# Altium PCB hazi_kiindulas.PcbDoc
Units mm, origin at the board's own origin, x right, y up, seen from the top; angles counter-clockwise.
Board outline 90.17 x 82.17 mm, 2 copper layers (Top Layer, Bottom Layer); 35 components, 55 nets, 240 pads, 42 vias.
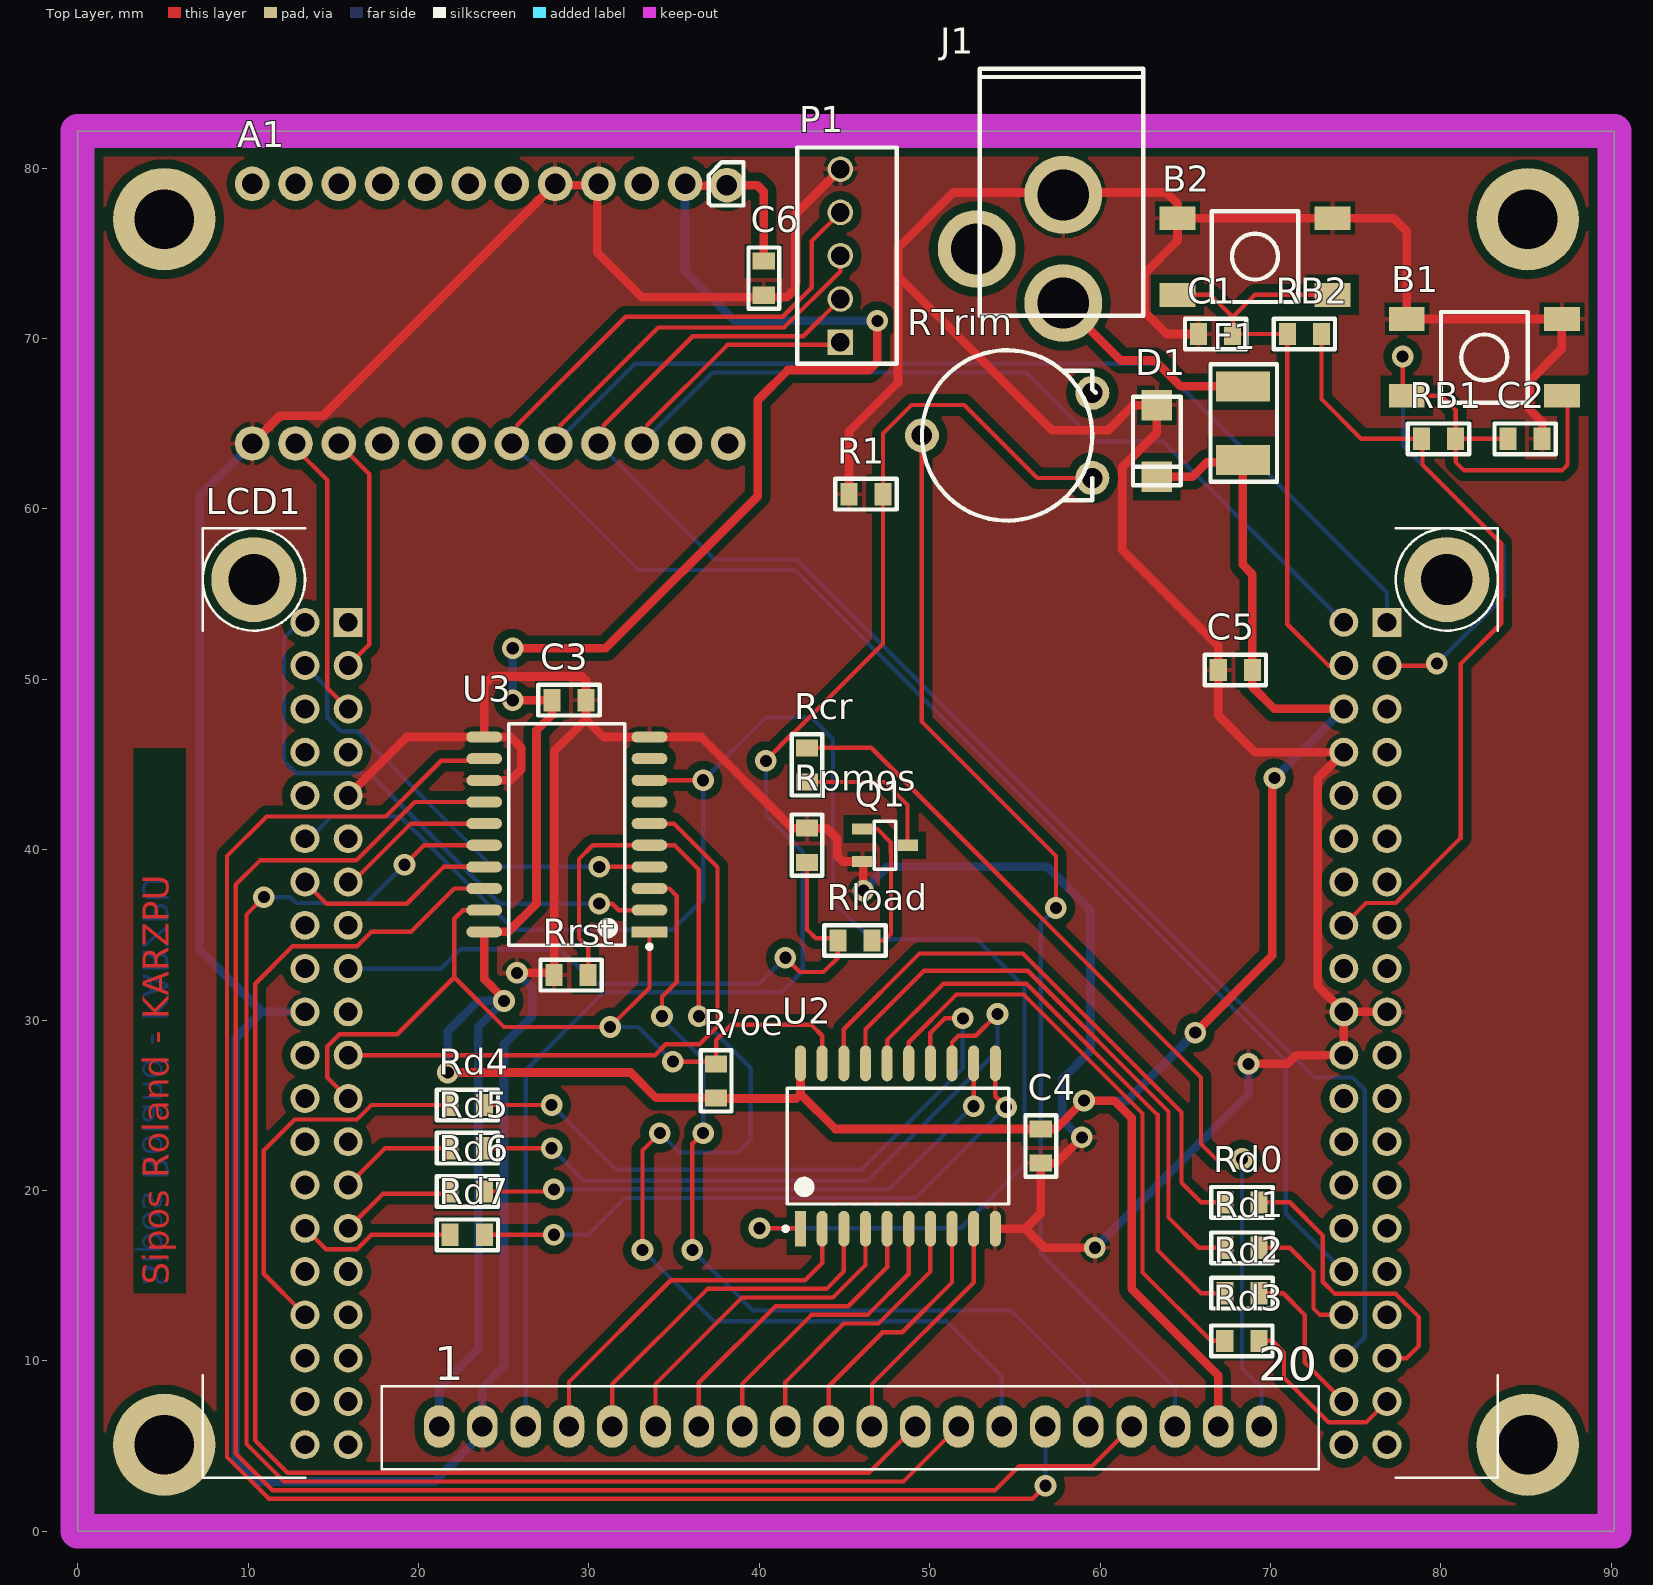
[diagram p0: Top Layer view]
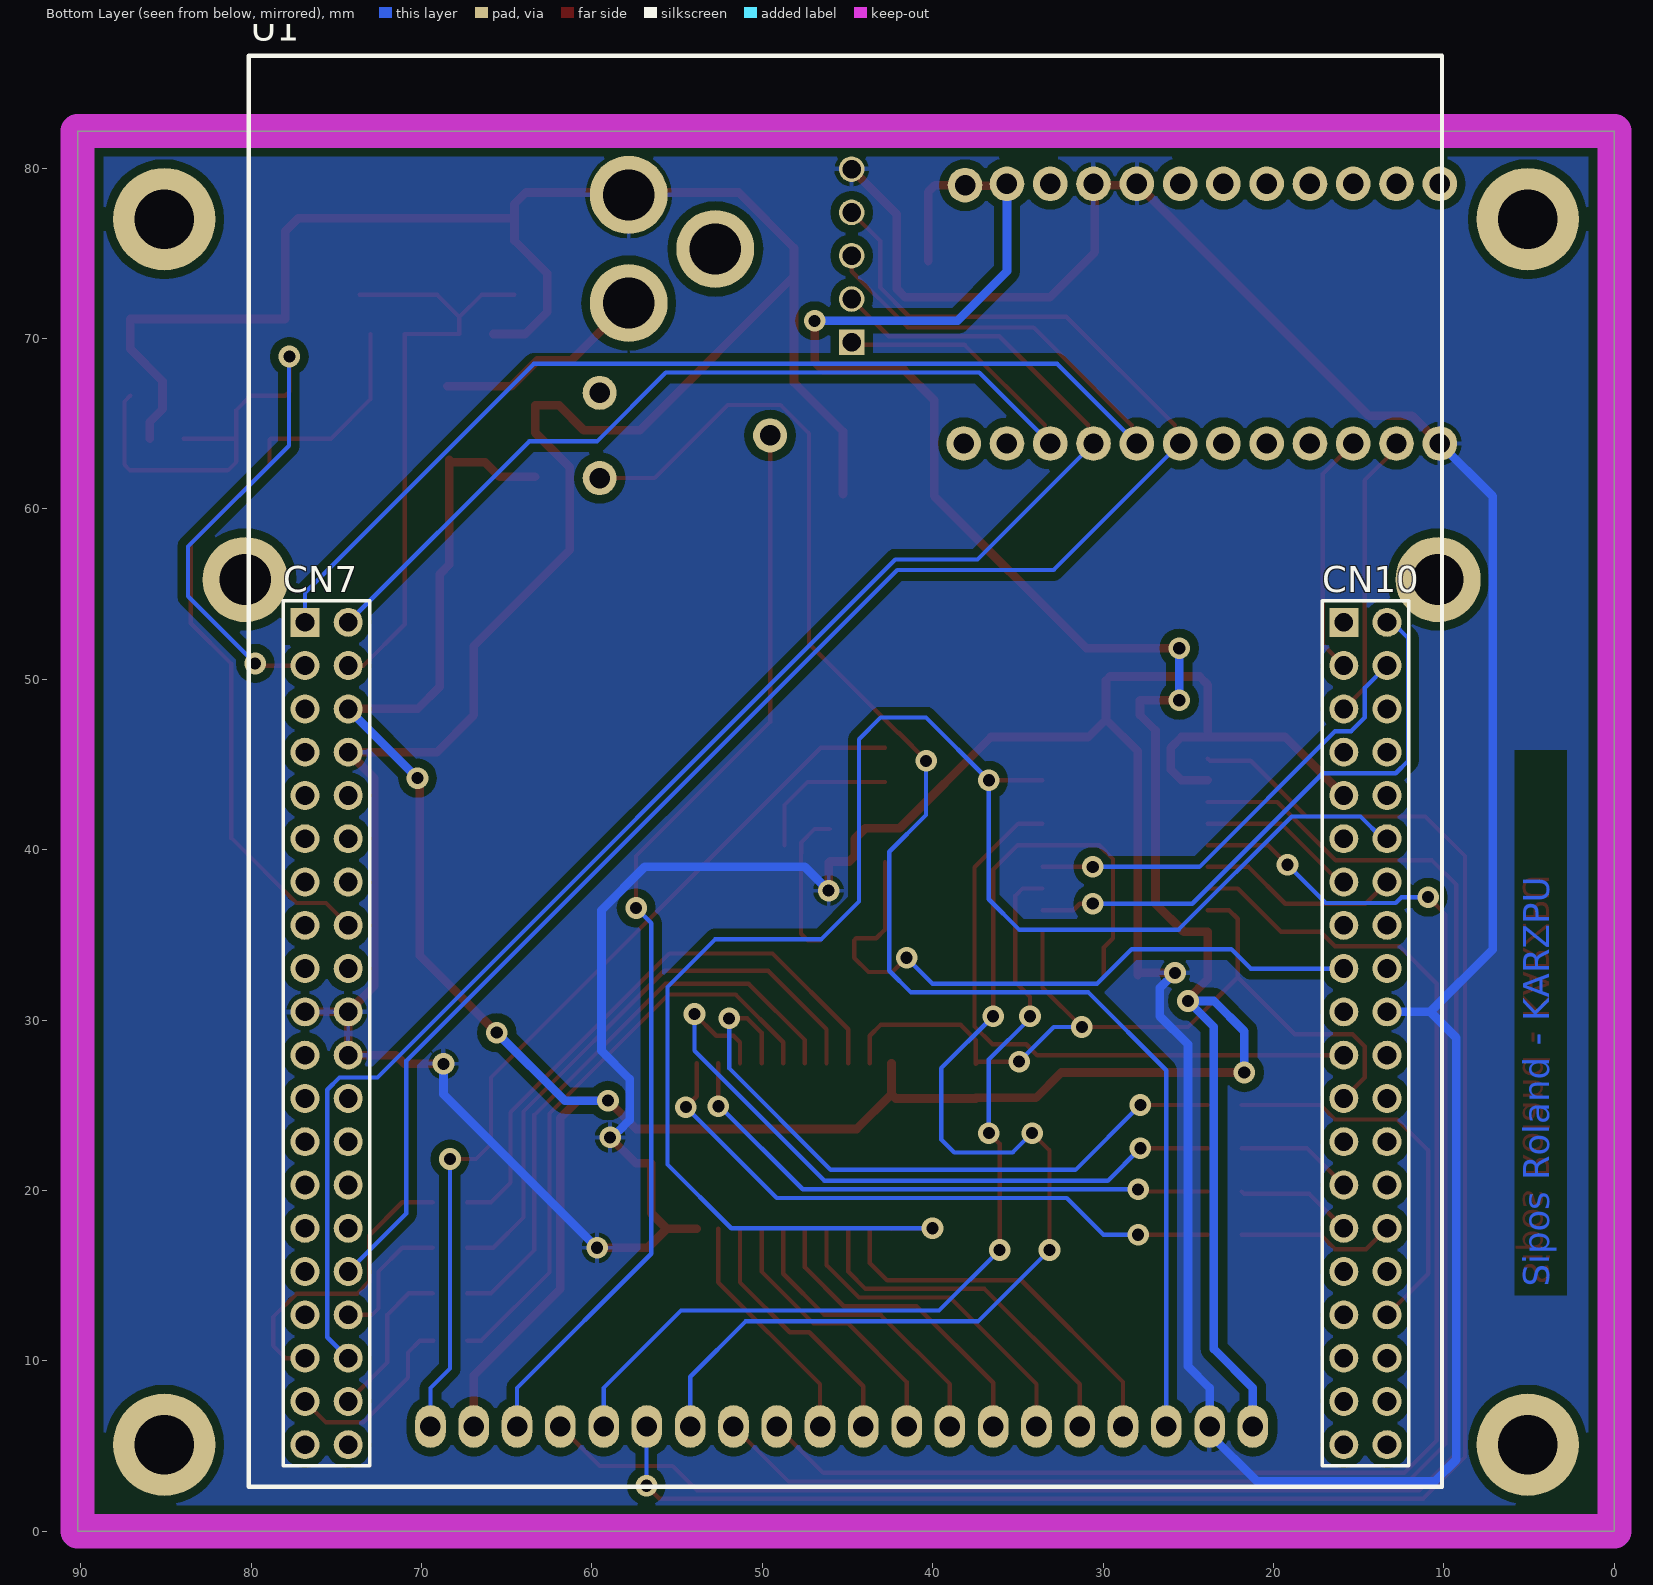
[diagram p1: Bottom Layer view, seen from below]
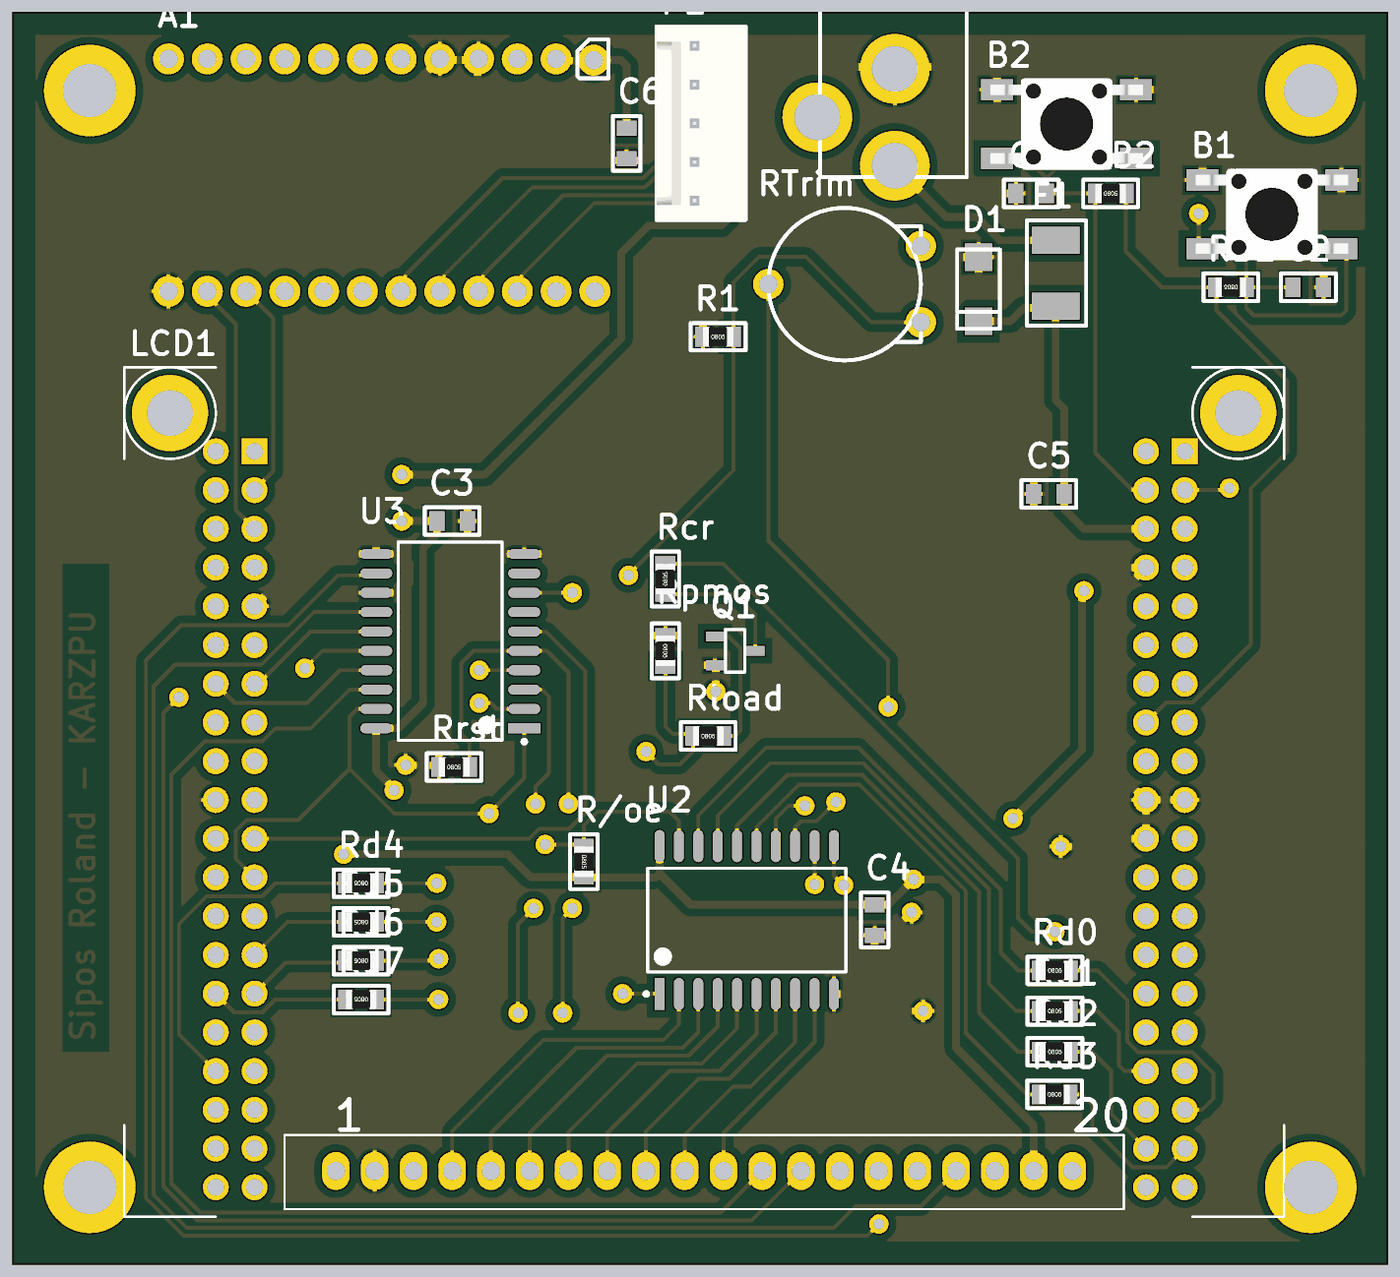
[diagram p2: 3D render of the assembled board from above, using the file's embedded part models]

## Layer stack, top to bottom
Top Solder: solder mask 0.0102, Solder Resist, Dk 3.5
Top Layer: signal copper 0.0356
Dielectric 1: dielectric 0.32, FR-4, Dk 4.8
Bottom Layer: signal copper 0.0356
Bottom Solder: solder mask 0.0102, Solder Resist, Dk 3.5

## Board outline
0,0 90.17,0 90.17,82.169 0,82.169

## Design rules (kind name [scope] priority, off if disabled: settings)
Clearance [All] p1: gap=0.254 ignorepadtopadclearanceinfootprint=FALSE except(0: Arc-Hole Track-Hole SMDPad-Hole THPad-Hole Via-Hole Fill-Hole Poly-Hole Region-Hole Text-Hole; 0.508: Arc-Fill Arc-Poly Arc-Region Track-Fill Track-Poly Track-Region SMDPad-Fill SMDPad-Poly SMDPad-Region THPad-Fill THPad-Poly THPad-Region Via-Fill Via-Poly Via-Region Fill-Fill Fill-Poly Fill-Region Poly-Poly Poly-Region Region-Region)
HoleSize [All] p1: absolutevalues=TRUE maxlimit=5.08 minlimit=0.025 maxpercent=80.000 minpercent=20.000
PolygonConnect [All] p1: connectstyle=Relief reliefconductorwidth=0.254 reliefentries=4 polygonreliefangle="90 Angle" airgapwidth=0.254
RoutingVias [All] p1: holewidth=0.711 width=1.27 viastyle="Through Hole" minholewidth=0.711 minwidth=1.27 maxholewidth=0.711 maxwidth=1.27
SolderMaskExpansion [All] p1: expansion=0.102
Width [All] p1: maxlimit=2.54 minlimit=0.254 preferedwidth=0.254 minimp=50.000000 maximp=50.000000 favimp=50.000000
29 further rules are at their usual default settings.

## Components (designator, comment, footprint, x,y, rotation, side; value= is the part's Value field where it differs from the comment)
A1 "Accelerometer" Seval 26.75,71.073 r270 top
B1 "Button" FP_BTN_SMD 82.543,68.885 r270 top
B2 "Button" FP_BTN_SMD 69.088,74.803 r270 top
C1 "100nF" FP_0805_CAP_085 66.777,70.256 r0 top
C2 "100nF" FP_0805_CAP_085 84.938,64.11 r180 top
C3 "100nF" FP_0805_CAP_085 28.829,48.768 r180 top
C4 "100nF" FP_0805_CAP_085 56.515,22.606 r90 top
C5 "100nF" FP_0805_CAP_085 67.929,50.546 r0 top
C6 "100nF" FP_0805_CAP_085 40.259,73.533 r270 top
D1 "TRANS SUPPR" FP_SMA 63.322,66.074 r270 top
F1 "Multifuse" FP_MULTIFUSE 68.377,67.183 r270 top
J1 "2.xmm" FP_DC_TAP_ANYA 57.836,72.075 r0 top
LCD1 "64128QCCBW-3LP" 64128Q 45.339,30 r0 top locked
P1 "Connector" FP_CONN5_TAP_254MM 44.755,69.774 r0 top
Q1 "PMOS" FP_SOT23-3 47.371,40.259 r180 top
R1 "3K9" FP_0805_RES 46.257,60.858 r0 top
R/oe "100K" FP_0805_RES 37.465,26.432 r270 top
RB1 "100K" FP_0805_RES 79.858,64.11 r180 top
RB2 "100K" FP_0805_RES 71.984,70.256 r0 top
Rcr "27R" FP_0805_RES 42.799,44.974 r90 top
Rd0 "1K" FP_0805_RES 68.326,19.304 r0 top
Rd1 "1K" FP_0805_RES 68.326,16.637 r0 top
Rd2 "1K" FP_0805_RES 68.326,13.97 r0 top
Rd3 "1K" FP_0805_RES 68.31,11.176 r0 top
Rd4 "1K" FP_0805_RES 22.86,25.019 r180 top
Rd5 "1K" FP_0805_RES 22.86,22.479 r180 top
Rd6 "1K" FP_0805_RES 22.86,19.939 r180 top
Rd7 "1K" FP_0805_RES 22.86,17.399 r180 top
Rload "1K" FP_0805_RES 45.609,34.671 r0 top
Rpmos "10K" FP_0805_RES 42.799,40.259 r270 top
Rrst "10K" FP_0805_RES 28.956,32.639 r0 top
RTrim "RPot" FP_RES_POT 59.54,66.806 r270 top value=10-2200R
U1 "NUCLEO-F446RE" FP_NUCLEO-64 76.835,53.34 r180 bottom locked
U2 "74HCT245" SOP127P1030X265-20M 48.133,22.606 r90 top locked
U3 "74HCT244D" SOP127P1030X265-20M 28.702,40.894 r180 top locked

## Footprints (in the part's own frame and the unit in brackets; to place one, negate y for a bottom-side part, rotate by r counter-clockwise, add the part's x,y. Pads: shape width x height; smd on the part's side, far side on the other; paste and mask are expansions set on the pad)
64128Q [mm] "64x128 pixel graphical LCD display"
  oval 1.8x2.5 hole 1.2: 1(-24.13,-23.85) 2(-21.59,-23.85) 3(-19.05,-23.85) 4(-16.51,-23.85) 5(-13.97,-23.85) 6(-11.43,-23.85) 7(-8.89,-23.85) 8(-6.35,-23.85) 9(-3.81,-23.85) 10(-1.27,-23.85) 11(1.27,-23.85) 12(3.81,-23.85) 13(6.35,-23.85) 14(8.89,-23.85) 15(11.43,-23.85) 16(13.97,-23.85) 17(16.51,-23.85) 18(19.05,-23.85) 19(21.59,-23.85) 20(24.13,-23.85)
  round 5 hole 3: ""(-35,25.85) ""(35,25.85)
  silkscreen extent -38,-26.85 38,28.85, body extent -38,-26.85 38,28.85, height 15.9
FP_0805_CAP_085 [mm] "0805 kapacitás YAGEO 0.85mm magas"
  rect 1x1.3 smd: 1(-1,0) 2(1,0)
  silkscreen extent -1.8,-0.9 1.8,0.9, body extent -1,-0.64 1.03,0.64, height 0.85
FP_0805_RES [mm] "0805 ellenállás"
  rect 1x1.3 smd: 1(-1,0) 2(1,0)
  silkscreen extent -1.8,-0.9 1.8,0.9, body extent -1,-0.62 1,0.63, height 0.62
FP_BTN_SMD [mm] "SMD Push Button 6x6mm"
  rect 1.4x2.1 smd: 1(2.25,4.55) 2(2.25,-4.55) 3(-2.25,4.55) 4(-2.25,-4.55)
  silkscreen extent -2.67,-2.54 2.67,2.54, body extent -3,-5 3,5, height 5.1
FP_CONN5_TAP_254MM [mm] "álló öt pólusú tápcsatlakozó 2.54mm"
  rect 1.5x1.5 hole 1.1: 1(0,0)
  round 1.5 hole 1.1: 2(0,2.54) 3(0,5.08) 4(0,7.62) 5(0,10.16)
  silkscreen extent -2.54,-1.27 3.3,11.43, body extent -2.54,-1.27 3.26,11.43, height 11.56
FP_DC_TAP_ANYA [mil] "DC HEBA25 TÁPFESZÜLTSÉG ALJZAT ZÁRT, NYÁKBA 90°"
  round 180 hole 118: 1(0,0) 2(0,250) 3(-200,125)
  silkscreen extent -193,-30 185,541, body extent -190,-31 183,539, height 440
FP_MULTIFUSE [mm] "POLYFUSE SMD 1812"
  rect 1.78x3.15 smd: 1(0,0) 2(4.318,0)
  silkscreen extent -1.3,-1.9 5.6,2, body extent -0.13,-1.65 4.57,1.78, height 1
FP_NUCLEO-64 [mm]
  round 1.7 hole 1.1: 0(0,-48.26) 0(2.54,-48.26) 0(60.96,-48.26) 0(63.5,-48.26) 2(2.54,0) 3(0,-2.54) 4(2.54,-2.54) 5(0,-5.08) 6(2.54,-5.08) 7(0,-7.62) 8(2.54,-7.62) 9(0,-10.16) 10(2.54,-10.16) 11(0,-12.7) 12(2.54,-12.7) 13(0,-15.24) 14(2.54,-15.24) 15(0,-17.78) 16(2.54,-17.78) 17(0,-20.32) 18(2.54,-20.32) 19(0,-22.86) 20(2.54,-22.86) 21(0,-25.4) 22(2.54,-25.4) 23(0,-27.94) 24(2.54,-27.94) 25(0,-30.48) 26(2.54,-30.48) 27(0,-33.02) 28(2.54,-33.02) 29(0,-35.56) 30(2.54,-35.56) 31(0,-38.1) 32(2.54,-38.1) 33(0,-40.64) 34(2.54,-40.64) 35(0,-43.18) 36(2.54,-43.18) 37(0,-45.72) 38(2.54,-45.72) 40(63.5,0) 41(60.96,-2.54) 42(63.5,-2.54) 43(60.96,-5.08) 44(63.5,-5.08) 45(60.96,-7.62) 46(63.5,-7.62) 47(60.96,-10.16) 48(63.5,-10.16) 49(60.96,-12.7) 50(63.5,-12.7) 51(60.96,-15.24) 52(63.5,-15.24) 53(60.96,-17.78) 54(63.5,-17.78) 55(60.96,-20.32) 56(63.5,-20.32) 57(60.96,-22.86) 58(63.5,-22.86) 59(60.96,-25.4) 60(63.5,-25.4) 61(60.96,-27.94) 62(63.5,-27.94) 63(60.96,-30.48) 64(63.5,-30.48) 65(60.96,-33.02) 66(63.5,-33.02) 67(60.96,-35.56) 68(63.5,-35.56) 69(60.96,-38.1) 70(63.5,-38.1) 71(60.96,-40.64) 72(63.5,-40.64) 73(60.96,-43.18) 74(63.5,-43.18) 75(60.96,-45.72) 76(63.5,-45.72)
  rect 1.7x1.7 hole 1.1: 1(0,0) 39(60.96,0)
  silkscreen extent -3.3,-50.72 66.72,33.25, body extent -3.3,-50.72 66.72,33.25, height 11
FP_RES_POT [mm] "BOURNS - 3386H-1-103LF - TRIMMER, 10K"
  round 2 hole 1.2: 1(0,0) 2(2.5,-10) 3(5,0)
  silkscreen extent -2.5,-10 7.5,0.2, body extent -0.4,-0.4 5.48,0.4
FP_SMA [mm] "SMA DO-214AC tok"
  rect 1.8x1.8 smd: 1(0,0) 2(4.2,0)
  silkscreen extent -0.5,-1.4 4.7,1.4, body extent -0.5,-1.3 4.7,1.3, height 2.42
FP_SOT23-3 [mm] "SOT23-3 tok"
  rect 1.2x0.65 smd: 1(1.327,-0.95) 2(1.327,0.95) 3(-1.327,0)
  silkscreen extent -0.64,-1.4 0.64,1.4, body extent -1.27,-1.46 1.27,1.46, height 0.97
Seval [mil]
  round 80 hole 47.24: 1(-311.85,446.85) 2(-315,350) 3(-315,250) 4(-315,150) 5(-315,50) 6(-315,-50) 7(-315,-150) 8(-315,-250) 9(-315,-350) 10(-315,-450) 11(-315,-550) 12(-315,-650) 13(285,-650) 14(285,-550) 15(285,-450) 16(285,-350) 17(285,-250) 18(285,-150) 19(285,-50) 20(285,50) 21(285,150) 22(285,250) 23(285,350) 24(285,450)
  silkscreen extent -365,405 -265,485
SOP127P1030X265-20M [mm] "SOP, 20-Leads, Body 12,80x7,50mm, Pitch 1,27mm, IPC Low Density"
  rect 2.1x0.65 smd: 1(-4.85,5.715)
  oval 2.1x0.65 smd: 2(-4.85,4.445) 3(-4.85,3.175) 4(-4.85,1.905) 5(-4.85,0.635) 6(-4.85,-0.635) 7(-4.85,-1.905) 8(-4.85,-3.175) 9(-4.85,-4.445) 10(-4.85,-5.715) 11(4.85,-5.715) 12(4.85,-4.445) 13(4.85,-3.175) 14(4.85,-1.905) 15(4.85,-0.635) 16(4.85,0.635) 17(4.85,1.905) 18(4.85,3.175) 19(4.85,4.445) 20(4.85,5.715)
  silkscreen extent -4.97,-6.5 3.4,6.71, body extent -5.16,-6.5 5.16,6.5, height 2.65

## Part data
A1: library part STEVAL-MKI160V1, Name=Accelerometer, Supplier="ST tanszek"
B1 B2: "Push button", Name="TACT 6x 6 4P SPST 1 FSM2JSMA (TYC) 50mA 12VDC SMD H=4.3mm 160g BLACK B. 2-1437565-7", Reference=45-05-42, Supplier=Lomex
C1 C2 C3 C4 C5 C6: library part "CAP 100nF", "Capacitor", Tolerance=10%, Voltage=50V, Name="100nF 0805 10% 50V X7R 0805B104K500CT (WAL)", Reference=82-10-76, Supplier=Lomex
D1: "Transient suppressor", Voltage=6.7V, Name="6.7V Ubr 400W UNIDIR. 5V Urwm SMAJ5.0A (LFS) DO-214AC (SMA) ½AE½", Reference=96-00-75, Supplier=Lomex
F1: "1812 Multifuse", Name="1.1A 16V 1812L110/16DR POLYFUSE SMD 1812 (LFS) ½LF110-16½", Reference=44-02-36, Supplier=Lomex
J1: library part DC_TAP_ANYA, "2.xmm DC HEBA25 TÁPFESZÜLTSÉG ALJZAT ZÁRT, NYÁKBA 90°", Name="TÁP DC ANYA 5.5/2.1/9.5mm DCS-5521-5", Reference=43-07-67, Supplier=Lomex
LCD1: "Led Display Module", Name="128x 64 DOT LIGHT:LED 64128QCCBW-3LP (DIS) 0.4/DOT 75x53mm BLUE STN LOW.POW. WIDE TEMP. (CONTROLLER/DRIVER: SBN6400G-D + SBN0064G-D)", Reference=37-00-71, Supplier=Lomex
P1: library part Connector_5pin, "5pin Connector"
Q1: "MOSFET, P CH", Name="BSS84 (FAI) P-FET 50V 0.13A Rds<10R SOT-23 ½13*½", Reference=86-03-27, Supplier=Lomex
R1: library part "RES 3K9", "Resistor", Power=125mW, Tolerance=5%, Name="3K90 0805 5% CR-05JL7---3K9 0.125W (VIK)", Reference=81-10-94, Supplier=Lomex
R/oe RB1 RB2: library part "RES 100K", "Resistor", Power=125mW, Tolerance=5%, Name="100K 0805 5% CR-05JL7--100K 0.125W (VIK)", Reference=81-11-11, Supplier=Lomex
Rcr: library part "RES 27R", "Resistor", Power=125mW, Tolerance=5%, Name="27R0 0805 5% CR-05JL7---27R 0.125W (VIK)", Reference=81-10-68, Supplier=Lomex
Rd0 Rd1 Rd2 Rd3 Rd4 Rd5 Rd6 Rd7 Rload: library part "RES 1K", "Resistor", Power=125mW, Tolerance=5%, Name="1K00 0805 5% CR-05JL7----1K 0.125W (VIK)", Reference=81-10-87, Supplier=Lomex
Rpmos Rrst: library part "RES 10K", "Resistor", Power=125mW, Tolerance=5%, Name="10K0 0805 5% CR-05JL7---10K 0.125W (VIK)", Reference=81-10-99, Supplier=Lomex
RTrim: "Potentiometer", 5="Enter the Resistance value and the set point into parameter fields.", Name="2K20 PT10LV10 (KEN) D=10 TOP ADJ. 5x10", Reference=05-07-17, Supplier=Lomex
U2: "8x Bidirectional bus transciever", Name="74HCT245D  Transceiver, 74HCT245", Reference=87-06-35, Supplier=Lomex
U3: "8xBuffer/Line Driver", Name="74HCT244D-Q100,118  Buffer / Line Driver, 74HCT244", Reference=87-05-95, Supplier=Lomex
U1: Name="Nucleo F446RE", Reference=NUCLEO, Supplier=Tanszék

## Free pads (board coordinates)
  round 6 hole 3.5: ""(5.08,5.08) ""(5.08,77) ""(85.09,5.08) ""(85.09,77)

## Via types
v1: diameter 1.27, hole 0.711, Top Layer to Bottom Layer, 42 vias

## Nets (pads, with @x,y where several pads share a name; then routed paths per layer and width w, separated by ;. In a path a pad name is that pad's centre, name@x,y a point inside that pad or via, vN(x,y) a via of type N, cw(c..) or ccw(c..) an arc to the next point about the centre after c; other vN are vias at no path point)
+3: RB1.2 RB2.2 U1.16 | length 46.4
  Top Layer w0.254: RB2.2 72.984,66.437 75.311,64.11 RB1.2 78.918,64.049 78.918,62.586 83.541,57.963 83.541,53.289 81.153,50.902 81.153,40.677 77.345,36.869 75.604,36.869 U1.16 U1.16@74.676,35.56
+5: A1.1 A1.2 C3.2 C4.2 C5.2 C6.1 D1.2 F1.2 LCD1.1 LCD1.19 R/oe.2 U1.6 U2.20 U3.20 | length 240.6
  Top Layer w0.508: v1(21.717,26.924) 32.449,26.924 33.941,25.432 R/oe.2 ; v1(25.019,31.115) 25.019,31.242 23.852,32.409 U3.20 25.273,35.179 26.924,36.83 26.924,46.99 27.829,47.895 C3.2 v1(25.527,48.768) ; v1(25.527,51.816) 30.974,51.816 39.903,60.745 39.903,66.37 41.681,68.148 46.457,68.148 46.926,68.617 v1(46.926,71.032) ; A1.2 35.76,78.954 A1.1@38.14,78.954 ; R/oe.2@37.465,25.4 42.164,25.4 42.418,25.654 ; A1.1 39.878,78.994 40.259,78.613 C6.1 ; U2.20 42.418,25.654 ; D1.2 65.405,61.874 66.269,62.738 F1.2@68.377,62.738 ; v1(65.583,29.261) 70.104,33.782 70.104,43.688 70.612,44.196 v1(70.231,44.196) ; LCD1.19 66.929,9.144 61.849,14.224 61.849,24.257 60.833,25.273 v1(59.055,25.273) 57.388,23.606 C4.2 44.466,23.606 42.418,25.654 ; F1.2 F1.2@68.377,62.738 ; U1.6 70.231,48.26 68.929,49.562 C5.2 68.929,56.166 68.377,56.718 F1.2@68.377,62.738
  Bottom Layer w0.508: LCD1.1 21.209,8.408 23.495,10.694 23.495,29.591 v1(25.019,31.115) 23.495,31.115 21.717,29.337 v1(21.717,26.924) ; v1(25.527,48.768) v1(25.527,51.816) ; A1.2 35.64,73.936 38.544,71.032 v1(46.926,71.032) ; v1(59.055,25.273) 61.595,25.273 v1(65.583,29.261) ; v1(70.231,44.196) U1.6
/CS1: LCD1.12 U3.18 | length 83.2
  Top Layer w0.254: U3.18 22.098,37.719 19.558,35.179 17.235,35.179 16.385,34.329 12.612,34.329 10.414,32.131 10.414,5.334 12.319,3.429 46.428,3.429 LCD1.12
/CS2: LCD1.13 U3.16 | length 91
  Top Layer w0.254: v1(10.922,37.211) 9.906,36.195 9.906,5.124 12.109,2.921 48.46,2.921 LCD1.13 ; v1(19.177,39.116) 20.32,40.259 U3.16
  Bottom Layer w0.254: v1(10.922,37.211) 12.483,37.211 12.825,36.869 16.93,36.869 v1(19.177,39.116)
B0: LCD1.4 U2.2 | length 22.4
  Top Layer w0.254: LCD1.4 28.829,8.763 34.798,14.732 42.672,14.732 43.688,15.748 U2.2
B1: LCD1.5 U2.3 | length 21.3
  Top Layer w0.254: LCD1.5 31.369,8.636 36.957,14.224 43.942,14.224 44.958,15.24 U2.3
B2: LCD1.6 U2.4 | length 19.8
  Top Layer w0.254: LCD1.6 33.909,8.636 38.989,13.716 44.323,13.716 46.228,15.621 U2.4
B3: LCD1.7 U2.5 | length 18.7
  Top Layer w0.254: LCD1.7 36.449,8.712 40.945,13.208 45.212,13.208 47.498,15.494 U2.5
B4: LCD1.8 U2.6 | length 17.6
  Top Layer w0.254: LCD1.8 38.989,8.636 43.053,12.7 46.355,12.7 48.768,15.113 U2.6
B5: LCD1.9 U2.7 | length 16.3
  Top Layer w0.254: LCD1.9 41.529,8.763 44.958,12.192 46.99,12.192 50.038,15.24 U2.7
B6: LCD1.10 U2.8 | length 15.3
  Top Layer w0.254: LCD1.10 44.069,8.509 47.244,11.684 48.387,11.684 51.308,14.605 U2.8
B7: LCD1.11 U2.9 | length 14.1
  Top Layer w0.254: LCD1.11 46.609,8.636 52.578,14.605 U2.9
D/I: LCD1.16 U3.3 | length 53
  Top Layer w0.254: U3.3 34.722,37.719 35.154,37.287 35.154,32.233 34.29,31.369 v1(34.29,30.226) ; v1(36.068,16.51) 36.068,22.733 v1(36.703,23.368)
  Bottom Layer w0.254: v1(34.29,30.226) 34.29,30.099 36.703,27.686 v1(36.703,23.368) ; v1(36.068,16.51) 39.624,12.954 54.763,12.954 59.309,8.408 LCD1.16
E: LCD1.17 U3.14 | length 105
  Top Layer w0.254: U3.14 19.775,42.799 16.346,39.37 10.693,39.37 9.271,37.948 9.271,4.572 11.43,2.413 53.834,2.413 55.256,3.835 59.534,3.835 LCD1.17
GND: A1.4 A1.5 A1.13 B1.3 B1.4 B2.3 B2.4 C1.1 C2.1 C3.1 C4.1 C5.1 C6.2 D1.1 J1.2 LCD1.2 P1.5 Q1.2 R1.1 Rpmos.1 Rrst.1 U1.8 U1.19 U1.20 U1.22 U1.47 U1.58 U2.10 U3.10 U3.11 U3.13 | length 443.6
  Top Layer w0.254: J1.2@55.931,78.562 J1.2@57.531,78.562
  Top Layer w0.508: A1.13@10.16,63.754 A1.13 11.862,65.456 14.402,65.456 27.94,78.994 30.48,78.994 30.48,75.057 33.131,72.406 41.605,72.406 42.113,72.914 42.113,77.292 P1.5 ; U1.47 19.304,46.609 U3.11 ; U3.13 25.4,44.069 26.035,44.704 26.035,45.974 25.4,46.609 U3.11 ; v1(25.781,32.766) 27.829,32.766 Rrst.1 27.956,45.768 29.829,47.641 ; R1.1 45.257,64.535 48.133,67.412 48.133,73.66 ; v1(46.101,37.592) 46.101,39.252 Q1.2 44.892,39.309 44.577,39.624 44.577,40.64 43.958,41.259 Rpmos.1 41.926,41.259 36.576,46.609 U3.10 30.861,46.609 29.829,47.641 ; U2.10 55.602,17.756 ; J1.2@55.931,78.562 51.384,78.562 48.133,75.311 48.133,73.66 ; J1.2@57.531,78.562 63.881,78.562 64.538,77.905 B2.4 ; v1(58.928,23.114) 57.42,21.606 C4.1 56.515,18.669 55.602,17.756 ; v1(59.69,16.637) 56.721,16.637 55.602,17.756 ; C1.1 63.906,70.256 62.611,71.552 62.611,73.812 64.538,75.739 B2.4 ; v1(68.707,27.432) 70.993,27.432 71.501,27.94 U1.22 U1.20 ; U1.19 U1.20 ; C2.1 85.938,65.091 85.192,65.837 85.192,67.488 87.093,69.39 B1.3 B1.4 77.993,76.286 77.227,77.053 B2.3 B2.4 ; U3.11 23.852,49.673 24.344,50.165 29.591,50.165 29.829,49.927 C3.1 29.829,47.641 ; 48.133,73.66 57.175,64.618 60.474,64.618 61.931,66.074 D1.1 63.322,64.465 61.29,62.433 61.29,57.589 66.929,51.95 C5.1 66.929,47.879 69.088,45.72 U1.8 72.771,44.196 72.771,32.004 U1.20
  Bottom Layer w0.508: A1.13 7.137,60.731 7.137,34.138 10.795,30.48 ; U1.58 10.795,30.48 ; v1@25.654,32.893 v1(25.781,32.766) 26.67,31.877 26.67,30.226 25.019,28.575 25.019,9.678 23.749,8.408 LCD1.2 23.749,5.715 20.955,2.921 10.552,2.921 9.271,4.202 9.271,28.956 10.795,30.48 ; v1(46.101,37.592) 47.498,38.989 56.896,38.989 59.436,36.449 59.436,28.194 57.785,26.543 57.785,24.13 58.42,23.495 ; v1(59.69,16.637) 68.707,25.654 v1(68.707,27.432)
NetF1_1: F1.1 J1.1 | length 12.7
  Top Layer w0.508: J1.1 61.204,68.707 63.208,68.707 64.73,67.185 64.73,67.183 F1.1 F1.1@68.478,67.183
NetLCD1_3: LCD1.3 R1.2 RTrim.3 | length 89.6
  Top Layer w0.254: v1(40.386,45.212) 40.386,45.25 41.991,46.855 42.029,46.855 47.257,52.083 R1.2 47.257,64.427 48.92,66.091 52.019,66.091 56.304,61.806 RTrim.3
  Bottom Layer w0.254: LCD1.3 26.289,27.051 30.861,31.623 41.275,31.623 42.545,32.893 42.545,39.878 40.386,42.037 v1(40.386,45.212)
NetLCD1_18: LCD1.18 RTrim.2 | length 65
  Top Layer w0.254: RTrim.2 49.54,47.488 57.404,39.624 v1(57.404,36.576)
  Bottom Layer w0.254: v1(57.404,36.576) 56.515,35.687 56.515,16.282 64.389,8.408 LCD1.18
NetLCD1_20: LCD1.20 Rcr.2 | length 54
  Top Layer w0.254: Rcr.2 46.569,45.974 65.913,26.63 65.913,22.733 66.802,21.844 v1(68.326,21.844)
  Bottom Layer w0.254: v1(68.326,21.844) 68.326,9.551 69.469,8.408 LCD1.20
NetQ1_1: Q1.1 Rload.2 | length 8.6
  Top Layer w0.254: Q1.1 46.929,41.209 47.717,40.421 47.717,39.776 47.727,39.767 47.727,35.065 47.333,34.671 Rload.2
NetQ1_2: Q1.3 Rcr.1 | length 8.8
  Top Layer w0.254: Rcr.1 47.339,43.974 48.698,42.615 Q1.3
NetRd0_1: Rd0.1 U2.18 | length 34.7
  Top Layer w0.254: U2.18 44.958,29.464 49.403,33.909 55.455,33.909 64.77,24.594 64.77,20.447 65.913,19.304 Rd0.1
NetRd1_1: Rd1.1 U2.17 | length 34.9
  Top Layer w0.254: U2.17 46.228,29.464 49.657,32.893 55.753,32.893 64.008,24.638 64.008,18.415 65.786,16.637 Rd1.1
NetRd2_1: Rd2.1 U2.16 | length 34.7
  Top Layer w0.254: U2.16 47.498,28.829 50.8,32.131 55.677,32.131 63.373,24.435 63.373,16.51 65.913,13.97 Rd2.1
NetRd3_1: Rd3.1 U2.15 | length 34.8
  Top Layer w0.254: U2.15 48.768,28.702 51.562,31.496 55.508,31.496 62.484,24.52 62.484,15.189 66.497,11.176 Rd3.1
NetRd4_1: Rd4.1 U2.14 | length 39.1
  Top Layer w0.254: Rd4.1 v1(27.813,25.019) ; U2.14 50.038,29.254 50.883,30.099 v1(51.943,30.099)
  Bottom Layer w0.254: v1(27.813,25.019) 31.623,21.209 45.974,21.209 51.943,27.178 v1(51.943,30.099)
NetRd5_1: Rd5.1 U2.13 | length 40.8
  Top Layer w0.254: Rd5.1 v1(27.813,22.479) ; U2.13 51.308,28.702 51.689,29.083 52.705,29.083 v1(53.975,30.353)
  Bottom Layer w0.254: v1(27.813,22.479) 29.718,20.574 46.355,20.574 53.975,28.194 v1(53.975,30.353)
NetRd6_1: Rd6.1 U2.12 | length 33.3
  Top Layer w0.254: Rd6.1 27.813,19.939 v1(27.94,20.066) ; v1(52.578,24.943) U2.12
  Bottom Layer w0.254: v1(27.94,20.066) 47.625,20.066 52.502,24.943 v1(52.578,24.943)
NetRd7_1: Rd7.1 U2.11 | length 36.6
  Top Layer w0.254: Rd7.1 v1(27.94,17.399) ; U2.11 53.848,25.527 v1(54.483,24.892)
  Bottom Layer w0.254: v1(27.94,17.399) 29.972,17.399 32.131,19.558 49.149,19.558 v1(54.483,24.892)
R/W: LCD1.15 U3.12 | length 106.2
  Top Layer w0.254: U3.12 23.725,45.212 21.336,45.212 18.073,41.949 11.088,41.949 8.763,39.624 8.763,4.362 11.22,1.905 56.03,1.905 v1(56.794,2.669) ; v1@56.794,3.023 v1(56.794,2.669) ; v1@56.971,2.846 v1(56.794,2.669)
  Bottom Layer w0.254: v1(56.794,2.669) LCD1.15@56.794,6.15
RST: LCD1.14 Rrst.2 U3.5 | length 72.6
  Top Layer w0.254: Rrst.2 29.956,34.254 29.413,34.797 29.413,39.446 30.226,40.259 U3.5 35.027,40.259 36.449,38.837 v1(36.449,30.226) ; v1(33.147,16.51) 33.147,22.352 v1(34.163,23.368)
  Bottom Layer w0.254: v1(33.147,16.51) 37.338,12.319 50.978,12.319 54.229,9.068 LCD1.14 ; v1(34.163,23.368) 35.306,22.225 38.735,22.225 39.497,22.987 39.497,27.178 v1(36.449,30.226)
STM_/CS1: U1.40 U3.2 | length 33.9
  Top Layer w0.254: v1(30.607,36.83) 31.369,36.83 31.75,36.449 U3.2
  Bottom Layer w0.254: U1.40 13.03,53.34 12.104,52.414 12.104,45.21 12.825,44.489 17.106,44.489 24.765,36.83 v1(30.607,36.83)
STM_/CS2: U1.42 U3.4 | length 26.1
  Top Layer w0.254: v1(30.607,38.989) U3.4
  Bottom Layer w0.254: U1.42 14.644,49.491 14.644,47.75 15.443,46.951 16.385,46.951 24.347,38.989 v1(30.607,38.989)
STM_/OE: R/oe.1 U1.61 U2.19 U3.1 U3.19 | length 52
  Top Layer w0.254: U1.61 14.644,26.631 14.644,28.45 15.365,29.171 18.757,29.171 22.098,32.512 ; U3.19 22.606,36.449 22.098,35.941 22.098,32.512 ; U3.1 33.552,31.901 v1(31.242,29.591) 25.019,29.591 22.098,32.512 ; v1(34.925,27.559) 37.338,27.559 R/oe.1 37.465,28.829 38.354,29.718 43.053,29.718 43.688,29.083 U2.19
  Bottom Layer w0.254: v1(31.242,29.591) 32.893,29.591 v1(34.925,27.559)
STM_BTN1: B1.1 B1.2 C2.2 RB1.1 U1.3 | length 47.9
  Top Layer w0.254: U1.3 79.629,50.8 v1(79.756,50.927) ; v1(77.749,68.936) 77.749,66.879 B1.2 80.025,66.635 80.858,65.802 RB1.1 ; C2.2 RB1.1 ; B1.1 87.427,66.301 87.427,62.586 87.097,62.255 81.356,62.255 80.858,62.754 RB1.1
  Bottom Layer w0.254: v1(77.749,68.936) 77.775,68.936 77.775,63.703 83.693,57.785 83.693,54.864 v1(79.756,50.927)
STM_BTN2: B2.1 B2.2 C1.2 RB2.1 U1.4 | length 35.7
  Top Layer w0.254: B2.2 66.476,72.553 67.777,71.252 ; B2.1 69.077,72.553 67.777,71.252 ; U1.4 73.406,50.8 70.984,53.222 RB2.1 C1.2 67.777,71.252
STM_CS: A1.19 P1.4 U1.32 | length 99.9
  Top Layer w0.254: 25.785,64.901 32.156,71.272 41.369,71.272 43.078,72.981 43.078,75.717 P1.4
  Bottom Layer w0.254: A1.19 32.903,56.411 42.083,56.411 70.891,27.603 70.891,18.644 U1.32
STM_D/I: U1.52 U3.17 | length 11.9
  Top Layer w0.254: U1.52 14.605,36.83 19.304,36.83 21.463,38.989 U3.17
STM_E: U1.59 U3.6 | length 36.8
  Top Layer w0.254: U1.59 33.869,27.94 34.504,28.575 36.493,28.575 37.541,29.624 37.541,38.964 34.976,41.529 U3.6
STM_INT1: A1.15 U1.41 | length 14.3
  Top Layer w0.254: A1.15 17.106,62.048 17.106,52.031 U1.41
STM_INT2: A1.14 U1.43 | length 16.9
  Top Layer w0.254: A1.14 12.78,63.547 14.644,61.683 14.644,49.491 U1.43
STM_LCD0: Rd0.2 U1.35 | length 17.6
  Top Layer w0.254: Rd0.2 71.12,19.304 73.064,17.36 73.064,14.642 73.775,13.931 77.345,13.931 78.703,12.573 78.703,10.885 77.978,10.16 U1.35
STM_LCD1: Rd1.2 U1.34 | length 7.9
  Top Layer w0.254: Rd1.2 71.12,16.637 72.517,15.24 72.517,13.081 72.898,12.7 U1.34
STM_LCD2: Rd2.2 U1.38 | length 9.2
  Top Layer w0.254: Rd2.2 70.739,13.97 72.009,12.7 72.009,9.906 U1.38
STM_LCD3: Rd3.2 U1.37 | length 10.9
  Top Layer w0.254: Rd3.2 70.104,11.176 70.79,10.49 70.79,9.01 73.411,6.389 75.604,6.389 U1.37
STM_LCD4: Rd4.2 U1.72 | length 22.7
  Top Layer w0.254: U1.72 10.922,15.113 10.922,22.352 12.739,24.169 16.385,24.169 17.235,25.019 Rd4.2
STM_LCD5: Rd5.2 U1.65 | length 6.9
  Top Layer w0.254: U1.65 18.034,22.479 Rd5.2
STM_LCD6: Rd6.2 U1.67 | length 6.9
  Top Layer w0.254: U1.67 17.907,19.812 21.733,19.812 Rd6.2
STM_LCD7: Rd7.2 U1.68 | length 9.4
  Top Layer w0.254: U1.68 14.566,16.549 16.385,16.549 17.235,17.399 Rd7.2
STM_PWM: Rload.1 Rpmos.2 U1.55 | length 38.4
  Top Layer w0.254: v1(41.529,33.655) 42.367,32.817 43.764,32.817 44.609,33.662 Rload.1 44.482,34.798 43.307,34.798 42.799,35.306 Rpmos.2
  Bottom Layer w0.254: U1.55 21.336,33.02 22.479,34.163 28.321,34.163 30.353,32.131 40.005,32.131 v1(41.529,33.655)
STM_R/W: U1.50 U2.1 U3.8 | length 99.6
  Top Layer w0.254: U3.8 v1(36.703,44.069) ; v1(40.005,17.78) 42.394,17.78 U2.1
  Bottom Layer w0.254: U1.50 13.589,40.64 14.898,41.949 18.925,41.949 25.568,35.306 34.925,35.306 36.703,37.084 v1(36.703,44.069) 40.386,47.752 43.053,47.752 44.323,46.482 44.323,36.957 46.545,34.734 52.768,34.734 55.562,31.941 55.562,21.526 51.816,17.78 v1@40.386,17.78
STM_RST: U1.51 U3.15 | length 9.4
  Top Layer w0.254: U1.51 16.129,38.1 19.558,41.529 U3.15
STM_SCL: A1.20 P1.3 U1.1 | length 79.1
  Top Layer w0.254: 28.325,64.901 34.061,70.637 41.453,70.637 44.755,73.939 P1.3
  Bottom Layer w0.254: A1.20 32.69,68.504 63.406,68.504 76.835,55.074 U1.1
STM_SDA: A1.21 P1.2 U1.36 | length 94.1
  Top Layer w0.254: 30.865,64.901 36.093,70.129 42.57,70.129 P1.2
  Bottom Layer w0.254: A1.21 37.371,57.023 42.189,57.023 72.581,26.631 74.805,26.631 75.526,25.91 75.526,11.391 U1.36 U1.36@74.041,10.16
STM_SDO: A1.22 P1.1 U1.2 | length 62.4
  Top Layer w0.254: 33.405,64.901 38.125,69.621 44.602,69.621 P1.1
  Bottom Layer w0.254: A1.22 37.262,67.996 55.657,67.996 59.696,63.957 63.678,63.957 U1.2
pads on no net: A1.3 A1.6 A1.7 A1.8 A1.9 A1.10 A1.11 A1.12 A1.16 A1.17 A1.18 A1.23 A1.24 J1.3 LCD1. RTrim.1 U1.0 U1.5 U1.7 U1.9 U1.10 U1.11 U1.12 U1.13 U1.14 U1.15 U1.17 U1.18 U1.21 U1.23 U1.24 U1.25 U1.26 U1.27 U1.28 U1.29 U1.30 U1.31 U1.33 U1.39 U1.44 U1.45 U1.46 U1.48 U1.49 U1.53 U1.54 U1.56 U1.57 U1.60 U1.62 U1.63 U1.64 U1.66 U1.69 U1.70 U1.71 U1.73 U1.74 U1.75 U1.76 U3.7 U3.9

## Polygon pours and split planes (outlines as drawn)
GND on Top Layer "Top_GND" (solid, remove dead copper, pour order 0): 0,0 90.17,0 90.17,82.169 0,82.169
GND on Bottom Layer "Bottom_GND" (solid, remove dead copper, pour order 1): 0,0 90.17,0 90.17,82.169 0,82.169

## Keep-outs
Keep-Out Layer:
  the board outline again, w2

## Other copper
Top Layer:
  text "Sipos Roland - KARZPU" at 5.334,14.478 h1.52 r90
Bottom Layer:
  text "Sipos Roland - KARZPU" at 3.81,14.351 h1.52 r270

## Silkscreen, mask and mechanical layers (free items; w line width, h text height)
Top Solder:
  the board outline again, w0.254

## Text inside footprints (layer, text, board x,y; h text height)
LCD1: Top Overlay "20" at 69.266,8.826 h2; Top Overlay "1" at 20.93,8.851 h2
U1: Bottom Overlay "CN7" at 78.105,55.118 h1.52; Bottom Overlay "CN10" at 17.145,55.118 h1.52